# EAGLE board board_1117REGULATOR (EAGLE 9.1.1)
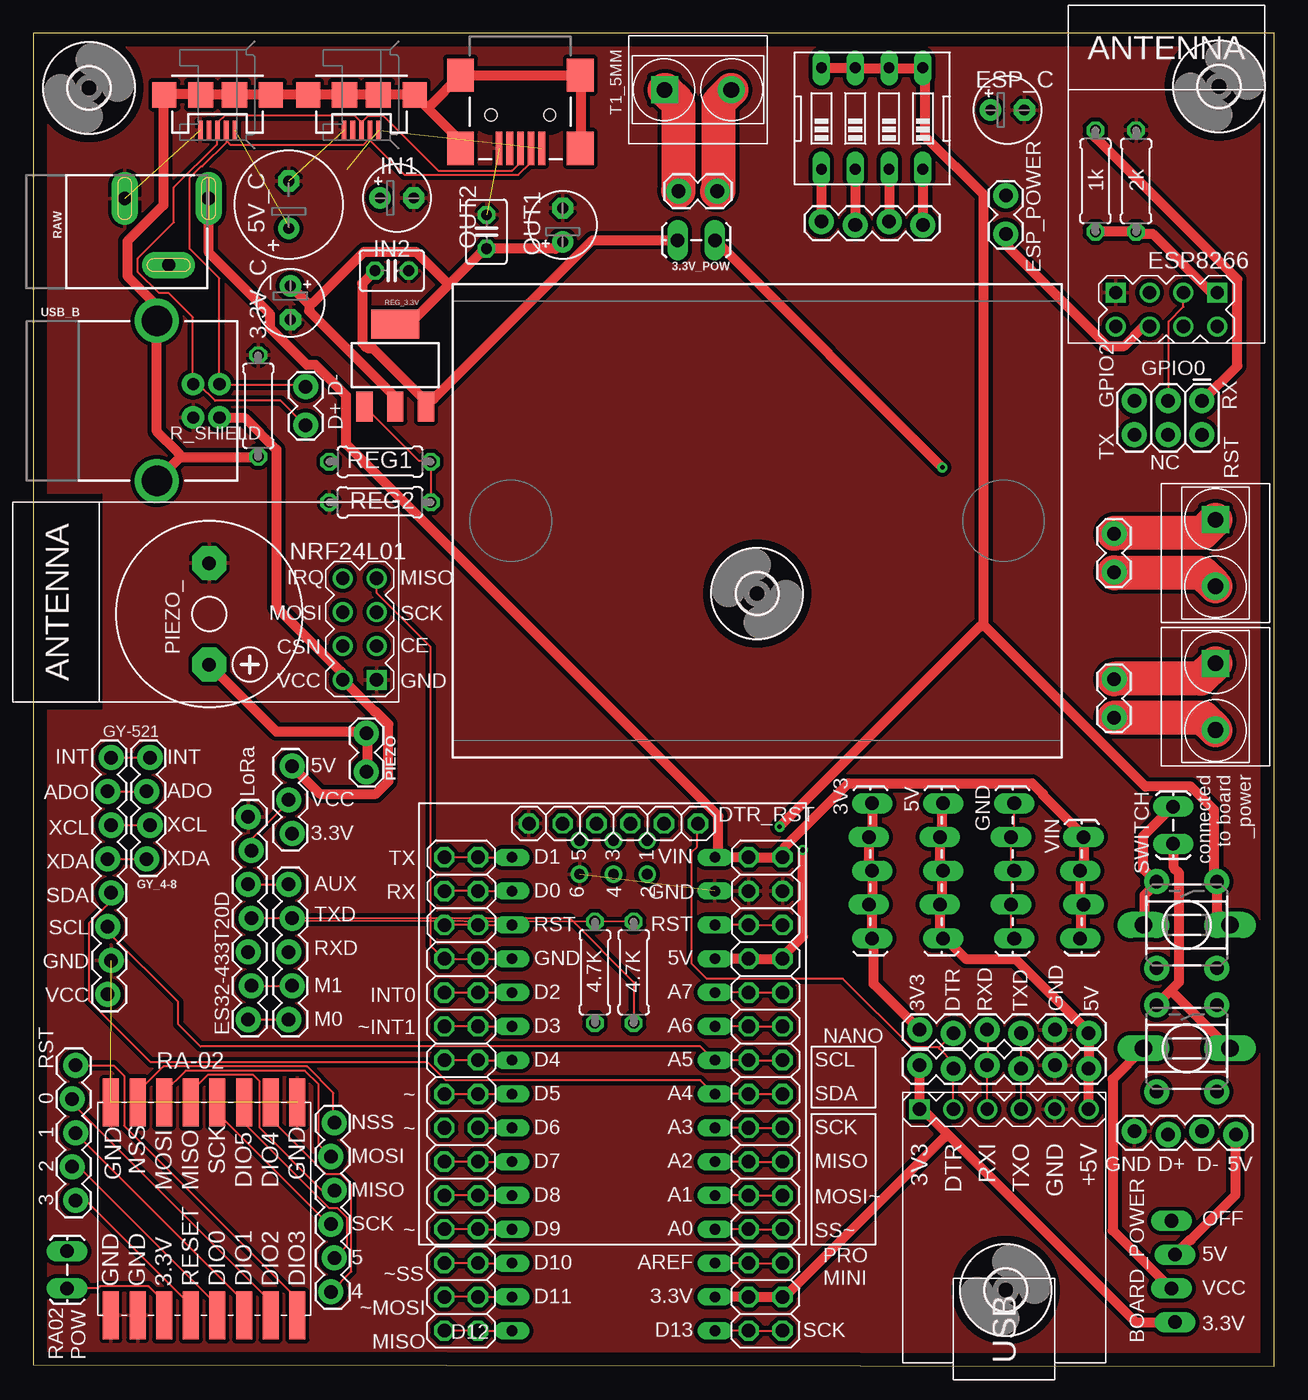
[diagram p0: board, top side]
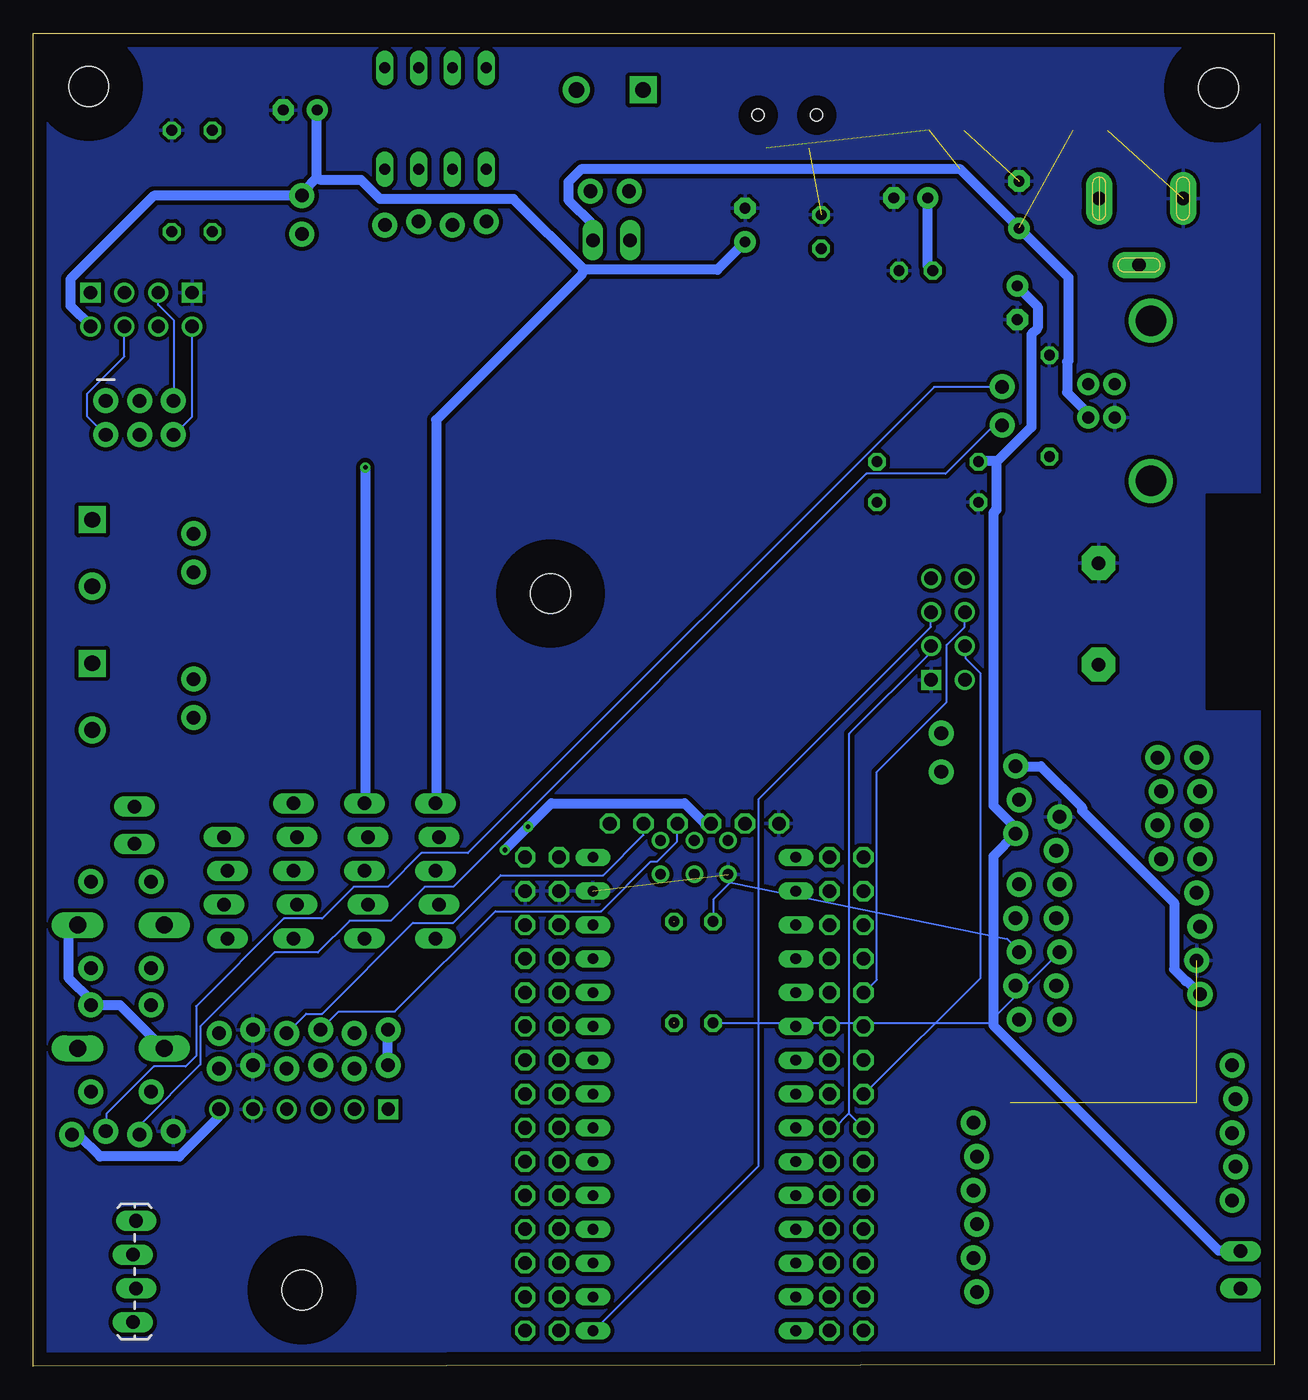
[diagram p1: board, bottom side, seen from below]

Size 93.2 x 100.13 mm. Coordinates in mm from the lower left corner, seen from the top.
Outline: 0,0.13 93.2,0 93.2,100.13 0,100.13 0,0.13
Copper layers (1*16): Top 0.035mm / dielectric 1.5mm / Bottom 0.035mm
Design rules "default": minimum track width 6mil, minimum drill 0.35mm, track to track 6mil, track to pad 6mil, pad to pad 6mil, via to via 6mil, smd to smd 6mil, copper to edge 40mil, drill to drill 6mil, minimum pad ring 10mil, minimum via ring 8mil, stop-mask expansion 4mil, vias tented up to drill 0mil, thermal gap 10mil
Net classes: 0 default: width 0.165 mm, drill 0.127 mm, clearance 0.152 mm; 1 power: width 0.762 mm, clearance 0.305 mm; 2 terminal: width 2.54 mm, clearance 0.305 mm
tRestrict: area 0.5,49.4 to 5.1,65.5
bRestrict: area 0.5,49.4 to 5.1,65.5

## Footprints (pad centres in the part's own frame; a part is rotated, then mirrored left to right if it is on the bottom)
1X03_LOCK = drill 1.016 pad 1.88: 1 0,0.127; 2 2.54,-0.127; 3 5.08,0.127
1X05_LOCK_LONGPADS = drill 1.016 long: 1 0,0; 2 2.54,-0.254; 3 5.08,0; 4 7.62,-0.254; 5 10.16,0
E2,5-5 = drill 0.813 pad 1.6: + -1.27,0 | drill 0.813 pad 1.6 octagon: - 1.27,0
1X02_LOCK_LONGPADS = drill 1.016 long: 1 -0.127,0; 2 2.667,0
E3,5-8 = drill 0.813 pad 1.6: + -1.778,0 | drill 0.813 pad 1.6 octagon: - 1.778,0
1X04_LOCK_LONGPADS = drill 1.016 long: 1 0,0; 2 2.54,-0.254; 3 5.08,0; 4 7.62,-0.254
USB-SERIAL-CP2102 = drill 1 square: 1 8.89,6.35 | drill 1: 2 8.89,3.81; 3 8.89,1.27; 4 8.89,-1.27; 5 8.89,-3.81; 6 8.89,-6.35
1X07_LOCK = drill 1.016 pad 1.88: 1 0,0.127; 2 2.54,-0.127; 3 5.08,0.127; 4 7.62,-0.127; 5 10.16,0.127; 6 12.7,-0.127; 7 15.24,0.127
0207/7 = drill 0.813 octagon: 1 -3.81,0; 2 3.81,0
WIRELESS-WIFI-ESP-01 = drill 1 square: A1 -8.89,3.81; D1 -8.89,-3.81 | drill 1: A2 -11.43,3.81; B1 -8.89,1.27; B2 -11.43,1.27; C1 -8.89,-1.27; C2 -11.43,-1.27; D2 -11.43,-3.81
2X3 = drill 1.016 pad 1.88: 1 0,0; 2 0,2.54; 3 2.54,0; 4 2.54,2.54; 5 5.08,0; 6 5.08,2.54
1X02_LOCK = drill 1.016 pad 1.88: 1 -0.178,0; 2 2.718,0
1X08_LOCK = drill 1.016 pad 1.88: 1 0,0.127; 2 2.54,-0.127; 3 5.08,0.127; 4 7.62,-0.127; 5 10.16,0.127; 6 12.7,-0.127; 7 15.24,0.127; 8 17.78,-0.127
1X04_LOCK = drill 1.016 pad 1.88: 1 0,0.127; 2 2.54,-0.127; 3 5.08,0.127; 4 7.62,-0.127
3,0 = hole 3: 0,0
C025-030X050 = drill 0.813 octagon: 1 -1.27,0; 2 1.27,0
1X05_LOCK = drill 1.016 pad 1.88: 1 0,0.127; 2 2.54,-0.127; 3 5.08,0.127; 4 7.62,-0.127; 5 10.16,0.127
1X06_LOCK = drill 1.016 pad 1.88: 1 0,0; 2 2.54,-0.254; 3 5.08,0; 4 7.62,-0.254; 5 10.16,0; 6 12.7,-0.254
USB-MICROB = smd 1.4 x 0.35: D+ -2.65,0; D- -2.65,-0.65; GND -2.65,1.3; ID -2.65,0.65; VBUS -2.65,-1.3 | smd 1.9 x 1.8: MT1 0,-4; MT2 0,4 | smd 1.9 x 1.9: P$1 0,-1.27; P$2 0,1.27
USB-MINIB = smd 2.5 x 0.5: D+ 2.5,0; D- 2.5,0.8; GND 2.5,-1.6; ID 2.5,-0.8; VBUS 2.5,1.6 | smd 2.5 x 2: S1 -3,4.5; S2 2.5,4.5; S3 -3,-4.5; S4 2.5,-4.5 | hole 0.9: 0,2.2; 0,-2.2
NANO = drill 0.8 long: 3.3V -10.16,24.13; 5V -10.16,-1.27; A0 -10.16,19.05; A1 -10.16,16.51; A2 -10.16,13.97; A3 -10.16,11.43; A4 -10.16,8.89; A5 -10.16,6.35; A6 -10.16,3.81; A7 -10.16,1.27; AREF -10.16,21.59; D2 5.08,1.27; D3 5.08,3.81; D4 5.08,6.35; D5 5.08,8.89; D6 5.08,11.43; D7 5.08,13.97; D8 5.08,16.51; D9 5.08,19.05; D10 5.08,21.59; D11 5.08,24.13; D12 5.08,26.67; D13 -10.16,26.67; GND -10.16,-6.35; GND1 5.08,-1.27; RAW -10.16,-8.89; RST -10.16,-3.81; RST1 5.08,-3.81; RX1 5.08,-6.35; TX0 5.08,-8.89 | drill 0.8: ICSP1 -5.08,-10.16; ICSP2 -5.08,-7.62; ICSP3 -2.54,-10.16; ICSP4 -2.54,-7.62; ICSP5 0,-10.16; ICSP6 0,-7.62
WIRELESS-NRF24L01 = drill 1 square: 1 -12.7,6.35 | drill 1: 2 -10.16,6.35; 3 -12.7,3.81; 4 -10.16,3.81; 5 -12.7,1.27; 6 -10.16,1.27; 7 -12.7,-1.27; 8 -10.16,-1.27
2X15 = drill 1.016 octagon: 1 -17.78,-1.27; 2 -17.78,1.27; 3 -15.24,-1.27; 4 -15.24,1.27; 5 -12.7,-1.27; 6 -12.7,1.27; 7 -10.16,-1.27; 8 -10.16,1.27; 9 -7.62,-1.27; 10 -7.62,1.27; 11 -5.08,-1.27; 12 -5.08,1.27; 13 -2.54,-1.27; 14 -2.54,1.27; 15 0,-1.27; 16 0,1.27; 17 2.54,-1.27; 18 2.54,1.27; 19 5.08,-1.27; 20 5.08,1.27; 21 7.62,-1.27; 22 7.62,1.27; 23 10.16,-1.27; 24 10.16,1.27; 25 12.7,-1.27; 26 12.7,1.27; 27 15.24,-1.27; 28 15.24,1.27; 29 17.78,-1.27; 30 17.78,1.27
F/CM12P = drill 1.016 pad 2.54 octagon: + 3.81,0; - -3.81,0
1X06/OCT = drill 1.016 octagon: 1 -6.35,0; 2 -3.81,0; 3 -1.27,0; 4 1.27,0; 5 3.81,0; 6 6.35,0
LORA-RA2-SMD = smd 3.6 x 1.2: 1 -8,7; 2 -8,5; 3 -8,3; 4 -8,1; 5 -8,-1; 6 -8,-3; 7 -8,-5; 8 -8,-7; 9 8,-7; 10 8,-5; 11 8,-3; 12 8,-1; 13 8,1; 14 8,3; 15 8,5; 16 8,7
POWER_JACK_SLOT = drill 1 pad 2 long: GND@1 2.58,7.5; GND@2 7.58,10.8; PWR 2.58,13.8
SOT223 = smd 1.219 x 2.235: 1 -2.311,-3.099; 2 0,-3.099; 3 2.311,-3.099 | smd 3.6 x 2.2: 4 0,3.099
TACTILE_SWITCH_PTH_6.0MM = drill 1.016 pad 1.88: 1 -3.251,2.261; 2 3.251,2.261; 3 -3.251,-2.261; 4 3.251,-2.261
DTS-3 = drill 1.3 long: 1 -3.25,0; 2 3.25,0
EDG-04 = drill 0.813 long: 1 -3.81,-3.81; 2 -1.27,-3.81; 3 1.27,-3.81; 4 3.81,-3.81; 5 3.81,3.81; 6 1.27,3.81; 7 -1.27,3.81; 8 -3.81,3.81
H2-5.0-10.5X8.0MM = drill 1.168 pad 2.032 square: 1 0,2.5 | drill 1.168 pad 2.032: 2 0,-2.5
USB-B-PTH = drill 0.914 pad 1.676: D+ 4,1.25; D- 5.981,1.25; GND 4,-1.25; VBUS 5.981,-1.25 | drill 2.286: SHLD1 1.282,-6.02; SHLD2 1.282,6.02

## Placement (x,y rotation side)
3.3/5  [1X03_LOCK]  19.3,45.09 270 top
3.3V  [1X05_LOCK_LONGPADS]  62.99,42.29 270 top
3.3V_C  [E2,5-5]  19.3,79.88 270 top
3.3V_POW  [1X02_LOCK_LONGPADS]  51.05,84.58 180 top
5V  [1X05_LOCK_LONGPADS]  68.33,42.29 270 top
5V_C  [E3,5-8]  19.18,87.25 90 top
B1  BREADBOARDMINI  [BREADBOARD-MINI]  54.36,63.5 180 top
BOARD_POWER  [1X04_LOCK_LONGPADS]  85.47,10.92 270 bottom
CP2102_USB-SERIAL  [USB-SERIAL-CP2102]  72.9,10.41 90 top
ES32-433T20D  [1X07_LOCK]  16.26,26.04 90 top
ESP1  1k  [0207/7]  79.76,89.03 90 top
ESP2  2k  [0207/7]  82.8,89.03 270 top
ESP8266  [WIRELESS-WIFI-ESP-01]  85.09,89.53 90 top
ESP_C  [E2,5-5]  73.15,94.36 0 top
ESP_H  [2X3]  87.76,72.52 180 top
ESP_POW  [1X02_LOCK]  73.03,87.76 270 top
GND  [1X05_LOCK_LONGPADS]  73.66,42.29 270 top
GY-521  [1X08_LOCK]  5.71,27.94 90 top
GY_4-8  [1X04_LOCK]  8.64,45.72 270 top
H1  MOUNT-HOLE3.0  [3,0]  4.19,96.01 0 top
H2  MOUNT-HOLE3.0  [3,0]  89.03,96.14 0 top
H3  MOUNT-HOLE3.0  [3,0]  73.03,5.71 0 top
H4  MOUNT-HOLE3.0  [3,0]  54.36,58.04 270 top
IN1  [E2,5-5]  27.3,87.76 0 top
IN2  [C025-030X050]  26.92,82.3 0 top
J1  [1X05_LOCK]  19.3,26.04 90 top
J2  [1X02_LOCK_LONGPADS]  85.6,41.91 270 top
J3  [1X02_LOCK_LONGPADS]  2.54,8.51 270 top
J4  [1X04_LOCK]  66.8,85.85 180 top
J5  [1X06_LOCK]  22.61,18.29 270 top
J6  [1X05_LOCK]  3.05,22.61 270 top
J7  [1X06_LOCK]  66.55,22.61 0 top
J8  [1X04_LOCK]  90.3,17.53 180 top
J9  [1X06_LOCK]  66.55,25.27 0 top
MICRO_1  [USB-MICROB]  24.64,95.5 90 top
MICRO_2  [USB-MICROB]  13.84,95.5 90 top
MINI_1  USB_MINI-B_SMT  [USB-MINIB]  36.58,93.98 270 top
NANO  NANO  [NANO]  41.02,29.34 180 top
NRF24L01  [WIRELESS-NRF24L01]  13.08,57.91 180 top
OUT1  [E2,5-5]  39.75,85.72 90 top
OUT2  [C025-030X050]  34.04,85.22 90 top
PH1  [2X15]  54.99,20.45 90 top
PH2  [2X15]  32.13,20.45 90 top
PIEZO  [1X02_LOCK]  25.02,44.83 90 top
PIEZO_  [F/CM12P]  13.21,56.52 270 top
PIN1  [1X02_LOCK]  51.18,88.27 180 top
PIN2  [1X02_LOCK]  81.15,59.82 90 top
PIN3  [1X02_LOCK]  81.15,48.9 90 top
PROMINI_H  [1X06/OCT]  43.56,40.77 0 top
R1  4.7k  [0207/7]  45.09,29.59 270 top
R2  4.7K  [0207/7]  42.16,29.59 270 top
R_SHIELD  10k  [0207/7]  16.89,72.14 90 top
RA-02  [LORA-RA2-SMD]  12.83,11.81 90 top
RAW  [POWER_JACK_SLOT]  -0.64,90.3 270 top
REG1  [0207/7]  26.04,67.94 180 top
REG2  [0207/7]  26.04,64.9 0 top
REG_3.3V  [SOT223]  27.18,75.18 0 top
S1  MOMENTARY-SWITCH-SPST-PTH-6.0MM  [TACTILE_SWITCH_PTH_6.0MM]  86.61,33.15 270 top
S2  MOMENTARY-SWITCH-SPST-PTH-6.0MM  [TACTILE_SWITCH_PTH_6.0MM]  86.61,23.88 270 top
S3  DTS-3  [DTS-3]  86.61,33.15 180 top
S4  DTS-3  [DTS-3]  86.61,23.88 180 top
SW1  [EDG-04]  62.99,93.73 0 top
T1_5MM  5mm  [H2-5.0-10.5X8.0MM]  49.91,95.88 90 top
T2_5MM  5mm  [H2-5.0-10.5X8.0MM]  88.77,61.09 0 top
T3_5MM  5mm  [H2-5.0-10.5X8.0MM]  88.77,50.29 0 top
USB_B  [USB-B-PTH]  8,72.52 0 top
USB_DATA  [1X02_LOCK]  20.45,73.41 270 top
VIN  [1X04_LOCK_LONGPADS]  78.61,32.13 90 top

## Library data of the parts
3.3/5 3.3V 3.3V_POW 5V ES32-433T20D ESP_POW GND GY-521 J1-J3 J5-J7 J9 PIEZO PIN1-PIN3 USB_DATA = SparkFun-Connectors
3.3V_C ESP_C IN1 IN2 OUT1 OUT2 = rcl; SPICEPREFIX: C
5V_C = resistor
B1 = SparkFun-Boards; PROD_ID: COMP-12034
BOARD_POWER GY_4-8 J4 J8 VIN = SparkFun-Connectors; PROD_ID: CONN-09696
CP2102_USB-SERIAL ESP8266 NRF24L01 = diy-modules
ESP1 ESP2 R1 R2 R_SHIELD REG1 REG2 = rcl; SPICEPREFIX: R
ESP_H = SparkFun-Connectors; PROD_ID: CONN-11566; VALUE: FEMALE 2x3
H1-H4 = holes
MICRO_1 MICRO_2 = SparkFun-Connectors; PROD_ID: CONN-09505; SF_ID: PRT-08533
MINI_1 = SparkFun-Connectors; PROD_ID: CONN-08193; SF_ID: PRT-00587
NANO = Arduino-clone
PH1 PH2 = pinhead
PIEZO_ = buzzer; OC_FARNELL: unknown; OC_NEWARK: unknown
PROMINI_H = pinhead_v2
RA-02 = LikeCircuit
RAW = SparkFun-Connectors; PROD_ID: PRT-00119
REG_3.3V = SparkFun-IC-Power; PROD_ID: VREG-08170
S1 S2 = SparkFun-Switches; PROD_ID: SWCH-08441; SF_SKU: COM-00097
S3 S4 = switch-tact
SW1 = special
T1_5MM T2_5MM T3_5MM = Seeed-Connector
USB_B = SparkFun-Connectors; PROD_ID: CONN-08278; SF_ID: PRT-00139

## Nets
3.3V [power]: 3.3/5.3 3.3V.1 3.3V.2 3.3V.3 3.3V.4 3.3V.5 3.3V_C.+ BOARD_POWER.4 CP2102_USB-SERIAL.1 ESP8266.D2 ESP_C.+ ESP_POW.1 J3.1 J7.1 J9.1 NANO.3.3V OUT1.+ OUT2.1 PH1.3 PH1.4 REG1.2 REG_3.3V.2 REG_3.3V.4
5V [power]: 3.3/5.1 3.3V_POW.1 5V.1 5V.2 5V.3 5V.4 5V.5 5V_C.+ BOARD_POWER.2 CP2102_USB-SERIAL.6 GY-521.1 J7.6 J8.1 J9.6 MICRO_1.VBUS MICRO_2.VBUS MINI_1.VBUS NRF24L01.2 USB_B.VBUS
A5: GY-521.3 NANO.A5 PH1.17 PH1.18
A6: NANO.A6 PH1.19 PH1.20
A7: NANO.A7 PH1.21 PH1.22
CE_NRF: NANO.D6 NRF24L01.3 PH2.13 PH2.14
CSN_NRF: NANO.D5 NRF24L01.4 PH2.15 PH2.16
D+_5PIN: J8.3 MICRO_1.D+ MICRO_2.D+ MINI_1.D+ USB_B.D+ USB_DATA.2
D-_5PIN: J8.2 MICRO_1.D- MICRO_2.D- MINI_1.D- USB_B.D- USB_DATA.1
GND [power]: 3.3V_C.- 5V_C.- CP2102_USB-SERIAL.5 ES32-433T20D.7 ESP2.1 ESP8266.A1 ESP_C.- GY-521.2 IN1.- IN2.2 J7.5 J8.4 J9.5 MICRO_1.GND MICRO_2.GND MINI_1.GND NANO.GND NANO.ICSP6 NRF24L01.1 OUT1.- OUT2.2 PH1.27 PH1.28 PIEZO_.- PROMINI_H.1 R_SHIELD.2 RA-02.1 RA-02.2 RA-02.9 RA-02.16 RAW.GND@1 REG2.1 USB_B.GND
MISO_NRF: NANO.GND1 NRF24L01.7 PH2.23 PH2.24
MOSI_NRF: NANO.D2 NRF24L01.6 PH2.21 PH2.22
N$1: ES32-433T20D.2 J1.2
N$2: GY-521.5 GY_4-8.4
N$3: NANO.AREF PH1.5 PH1.6
N$4: NANO.A0 PH1.7 PH1.8
N$5: NANO.A1 PH1.9 PH1.10
N$6: NANO.A2 PH1.11 PH1.12
N$7: NANO.A3 PH1.13 PH1.14
N$8: GY-521.6 GY_4-8.3
N$9: GY-521.7 GY_4-8.2
N$10: GY-521.8 GY_4-8.1
N$11: 3.3/5.2 ES32-433T20D.6
N$12: ES32-433T20D.1 J1.1
N$13: J1.4 R1.1
N$14: J1.3 R2.1
N$15: ES32-433T20D.4 R1.2
N$16: NANO.D12 PH2.1 PH2.2
N$17: NANO.D11 PH2.3 PH2.4
N$18: NANO.D10 PH2.5 PH2.6
N$19: NANO.D9 PH2.7 PH2.8
N$20: NANO.D8 PH2.9 PH2.10
N$21: NANO.D7 PH2.11 PH2.12
N$22: ES32-433T20D.5 J1.5
N$23 [terminal]: PIN1.2 T1_5MM.1
N$24: NANO.D4 PH2.17 PH2.18
N$25: NANO.D3 PH2.19 PH2.20
N$26 [terminal]: PIN1.1 T1_5MM.2
N$27 [terminal]: PIN2.2 T2_5MM.1
N$28: NANO.RST1 PH2.25 PH2.26
N$29: NANO.RX1 PH2.27 PH2.28
N$30: NANO.TX0 PH2.29 PH2.30
N$31 [terminal]: PIN2.1 T2_5MM.2
N$32 [terminal]: PIN3.2 T3_5MM.1
N$33 [terminal]: PIN3.1 T3_5MM.2
N$34 [power]: PIEZO.1 PIEZO.2 PIEZO_.+
N$35: GND.1 GND.2 GND.3 GND.4 GND.5
N$36 [power]: BOARD_POWER.3 NANO.5V PH1.23 PH1.24 PROMINI_H.3 S1.1 S2.1 S3.1 S4.2 SW1.5 SW1.6 SW1.7 SW1.8
N$37 [power]: J2.1 S1.3 S3.2
N$38: ES32-433T20D.3 R2.2
N$39 [power]: J4.1 SW1.4
N$40 [power]: J4.2 SW1.3
N$41 [power]: J4.3 SW1.2
N$42 [power]: J4.4 SW1.1
N$43 [power]: J2.2 S2.3 S4.1
N$44: J6.1 RA-02.8
N$45: J6.2 RA-02.7
N$46: J6.3 RA-02.6
N$47: J6.4 RA-02.5
N$48: J6.5 RA-02.4
N$49: J5.1 RA-02.15
N$50: J5.2 RA-02.14
N$51: J5.3 RA-02.13
N$52: J5.4 RA-02.12
N$53: J5.5 RA-02.11
N$54: J5.6 RA-02.10
N$55 [power]: ESP8266.B2 ESP_POW.2
N$56: CP2102_USB-SERIAL.2 J7.2 J9.2 PROMINI_H.6
N$57: CP2102_USB-SERIAL.3 J7.3 J9.3 PROMINI_H.4
N$58 [power]: ESP1.1 ESP2.2 ESP8266.D1
N$59: ESP8266.C2 ESP_H.2
N$60: ESP8266.C1 ESP_H.3
N$61 [power]: ESP1.2 ESP_H.1
N$62: CP2102_USB-SERIAL.4 J7.4 J9.4 PROMINI_H.5
N$63: ESP8266.B1 ESP_H.5
N$64: ESP8266.A2 ESP_H.6
N$76: J3.2 RA-02.3
N$77 [power]: 3.3V_POW.2 IN1.+ IN2.1 REG_3.3V.3
N$79: REG1.1 REG2.2 REG_3.3V.1
RST: NANO.RST PH1.25 PH1.26
SCK_NRF: NANO.D13 NRF24L01.5 PH1.1 PH1.2
SDA_GY521: GY-521.4 NANO.A4 PH1.15 PH1.16
SHIELD_IN [power]: MICRO_1.MT1 MICRO_1.MT2 MICRO_1.P$1 MICRO_1.P$2 MICRO_2.MT1 MICRO_2.MT2 MICRO_2.P$1 MICRO_2.P$2 MINI_1.S1 MINI_1.S2 MINI_1.S3 MINI_1.S4 R_SHIELD.1 USB_B.SHLD1 USB_B.SHLD2
VIN [power]: NANO.RAW PH1.29 PH1.30 RAW.PWR VIN.1 VIN.2 VIN.3 VIN.4

## Tracks (layer width: path | path; a pad name or v marks a point on that pad's centre or on a via)
3.3V
  Top 0.762: 3.3V.1 63.02,42.28 63.02,40.05 3.3V.2 62.79,39.73 62.79,37.51 3.3V.3 63.02,37.2 63.02,34.97 3.3V.4 62.79,34.66 62.94,34.5 62.94,32.2 3.3V.5 63.1,31.8 63.1,28.7 66.52,25.29 J9.1 | NANO.3.3V 51.2,5.21 53.66,5.21 PH1.4 54.05,5.21 56.2,5.21 PH1.3 56.59,5.37 68.42,17.19 68.66,17.43 | J7.1 66.52,22.59 66.52,19.34 CP2102_USB-SERIAL.1 66.91,19.18 68.66,17.43 | BOARD_POWER.4 82.79,3.3 68.66,17.43 | OUT1.+ 39.69,84.42 39.21,83.95 34.05,83.95 OUT2.1 33.73,83.79 31.19,81.25 | 31.19,81.25 28.26,78.31 27.23,78.31 REG_3.3V.4 | 20.72,79.74 20.72,79.26 27.15,72.83 27.15,72.12 REG_3.3V.2 | 20.72,79.74 19.37,81.09 3.3V_C.+ | 31.19,81.25 30.96,81.49 28.73,83.71 24.84,83.71 21.03,79.9 20.72,79.74
  Bottom 0.762: J9.1 66.6,25.21 66.6,22.67 J7.1 | J3.1 2.54,8.7 4.21,8.7 21.11,25.61 21.11,38.31 19.45,39.97 3.3/5.3 19.53,40.37 19.53,40.53 21.11,42.12 21.11,64.1 20.88,64.34 20.88,67.67 20.88,67.99 | ESP8266.D2 88.9,78.15 90.41,79.66 90.41,81.64 84.14,87.92 73.03,87.92 ESP_POW.1 72.87,88.31 71.91,89.27 | 71.91,89.27 71.91,94.34 ESP_C.+ | 20.88,67.99 20.8,67.99 18.26,70.53 18.26,77.52 17.78,77.99 17.78,79.58 19.29,81.09 3.3V_C.+ | 20.88,67.99 22.23,67.99 REG1.2 | 51.83,82.36 57.15,87.68 67.15,87.68 68.58,89.11 71.6,89.11 71.91,89.27 | 51.83,82.36 41.83,82.36 39.77,84.42 OUT1.+ | 3.3V.1 62.94,42.35 62.94,71.09 51.99,82.04 51.83,82.36
5V  (via drill 0.35)  (3 unrouted)
  Top 0.762: BOARD_POWER.2 86.84,9.49 86.92,9.49 90.25,12.83 90.25,17.35 J8.1 | CP2102_USB-SERIAL.6 79.22,19.34 79.22,22.35 J7.6 79.3,22.67 79.3,24.97 J9.6 79.06,25.29 73.74,30.61 70.01,30.61 68.66,31.96 5V.5 68.26,32.2 68.1,32.35 68.1,34.66 5V.4 68.26,34.97 68.26,37.2 5V.3 68.1,37.51 68.1,39.73 5V.2 68.26,40.05 68.26,42.28 5V.1 | 3.3/5.1 19.45,45.05 21.51,42.99 25.72,42.99 26.67,43.94 26.67,48.23 25.72,49.18 25.64,49.18 23.26,51.56 NRF24L01.2 23.1,51.88 23.1,52.2 18.26,57.04 18.26,68.87 15.88,71.25 14.05,71.25 USB_B.VBUS | v68.26,67.52 51.2,84.58 3.3V_POW.1
  Bottom 0.762: J8.1 90.25,17.35 89.77,17.35 88.19,15.76 82.23,15.76 79.3,18.7 79.3,19.26 CP2102_USB-SERIAL.6 | GY-521.1 5.64,27.99 6.59,28.94 6.67,28.94 7.54,29.81 7.54,34.81 14.45,41.72 14.45,41.96 17.54,45.05 19.37,45.05 3.3/5.1 | 3.3V_POW.1 51.2,84.58 51.2,85.77 53.02,87.6 53.02,88.95 52.07,89.9 23.57,89.9 19.21,85.53 5V_C.+ 18.89,85.22 15.48,81.8 15.48,75.53 15.56,75.45 15.56,73.15 14.05,71.64 14.05,71.33 USB_B.VBUS | v68.26,67.52 68.26,42.35 5V.1
A5
  Top 0.165: PH1.17 56.2,22.99 53.74,22.99 PH1.18 53.66,22.99 51.2,22.99 NANO.A5 51.12,22.99 50.09,24.02 12.54,24.02 10.87,25.69 10.87,27.35 5.64,32.59 5.64,32.99 GY-521.3
A6
  Top 0.165: NANO.A6 51.2,25.53 53.66,25.53 PH1.20 53.74,25.53 56.2,25.53 PH1.19
A7
  Top 0.165: NANO.A7 51.2,28.07 53.66,28.07 PH1.22 53.74,28.07 56.2,28.07 PH1.21
CE_NRF
  Top 0.165: NANO.D6 35.88,17.91 33.42,17.91 PH2.13
  Bottom 0.165: 31.91,18.94 31.91,47.51 25.8,53.63 25.8,54.1 NRF24L01.3 | 31.91,18.94 30.88,17.91 PH2.14 | PH2.13 33.34,17.91 33.02,17.91 31.99,18.94 31.91,18.94
CSN_NRF
  Top 0.165: NANO.D5 35.88,20.45 33.42,20.45 PH2.15 33.34,20.45 30.88,20.45 PH2.16
  Bottom 0.165: NRF24L01.4 23.18,54.1 23.18,53.15 22.07,52.04 22.07,29.18 30.8,20.45 PH2.16
D+_5PIN
  Top 0.165: MINI_1.D+ 36.51,91.41 36.51,90.38 35.96,89.82 30.4,89.82 26.27,93.95 25.16,93.95 24.69,93.47 MICRO_1.D+ 24.61,92.92 24.61,93.47 24.13,93.95 14.37,93.95 13.89,93.47 13.89,92.92 MICRO_2.D+ 13.81,92.84 13.81,91.8 10.56,88.55 10.56,85.93 7.86,83.23 7.86,82.2 9.45,80.61 10.16,80.61 11.99,78.79 11.99,73.79 USB_B.D+ 12.06,73.71 12.46,73.71 13.65,72.52 18.57,72.52 20.4,70.69 USB_DATA.2
  Bottom 0.165: J8.3 85.17,17.43 85.17,18.14 80.64,22.67 80.64,25.53 75.09,31.08 71.83,31.08 69.45,33.46 66.36,33.46 63.82,36 61.67,36 30.64,67.04 24.69,67.04 21.11,70.61 20.48,70.61 USB_DATA.2
D-_5PIN
  Top 0.165: 14.53,92.04 14.53,92.84 MICRO_2.D- | 14.53,92.04 14.84,91.73 24.77,91.73 25.2,92.16 | 25.2,92.16 25.24,92.2 25.24,92.84 MICRO_1.D- | MINI_1.D- 37.31,91.41 37.31,90.38 36.43,89.5 27.86,89.5 25.24,92.12 25.2,92.16 | USB_DATA.1 20.4,73.63 20.32,73.71 14.05,73.71 USB_B.D- 13.97,73.79 13.97,81.72 11.75,83.95 11.75,89.27 12.62,90.14 12.7,90.14 14.53,91.96 14.53,92.04
  Bottom 0.165: J8.2 87.71,17.67 87.71,18.94 84.14,22.51 81.76,22.51 80.96,23.3 80.96,27.04 74.37,33.62 71.52,33.62 69.14,36 66.6,36 64.06,38.54 60.56,38.54 25.56,73.55 20.48,73.55 USB_DATA.1
GND  (6 unrouted)
  pour Top: 0.13,100.08 0.13,0.13 93.22,0.13 93.22,100.08
  pour Bottom: 0,99.95 0,0 93.22,0 93.22,99.95 0,100.08
MISO_NRF
  Top 0.165: NANO.GND1 35.88,30.61 33.42,30.61 PH2.23 33.34,30.61 30.88,30.61 PH2.24 30.8,30.61 29.84,31.56 29.84,54.02 25.8,58.07 25.8,59.18 NRF24L01.7
MOSI_NRF
  Top 0.165: NANO.D2 35.88,28.07 33.42,28.07 PH2.21 33.34,28.07 30.88,28.07 PH2.22
  Bottom 0.165: NRF24L01.6 23.26,56.64 23.26,55.53 24.61,54.18 24.61,49.9 29.84,44.66 29.84,29.02 30.8,28.07 PH2.22
N$1
  Top 0.165: ES32-433T20D.2 16.43,28.54 19.37,28.54 J1.2
N$2
  Top 0.165: GY-521.5 5.64,38.07 8.49,38.07 GY_4-8.4
N$3
  Top 0.165: NANO.AREF 51.2,7.75 53.66,7.75 PH1.6 53.74,7.75 56.2,7.75 PH1.5
N$4
  Top 0.165: NANO.A0 51.2,10.29 53.66,10.29 PH1.8 53.74,10.29 56.2,10.29 PH1.7
N$5
  Top 0.165: NANO.A1 51.2,12.83 53.66,12.83 PH1.10 53.74,12.83 56.2,12.83 PH1.9
N$6
  Top 0.165: NANO.A2 51.2,15.37 53.66,15.37 PH1.12 53.74,15.37 56.2,15.37 PH1.11
N$7
  Top 0.165: NANO.A3 51.2,17.91 53.66,17.91 PH1.14 53.74,17.91 56.2,17.91 PH1.13
N$8
  Top 0.165: GY-521.6 5.87,40.61 8.73,40.61 GY_4-8.3
N$9
  Top 0.165: GY-521.7 5.64,43.15 8.49,43.15 GY_4-8.2
N$10
  Top 0.165: GY-521.8 5.87,45.69 8.73,45.69 GY_4-8.1
N$11
  Top 0.165: ES32-433T20D.6 16.43,38.78 16.43,39.66 19.13,42.35 19.13,42.51 3.3/5.2
N$12
  Top 0.165: ES32-433T20D.1 16.19,26 19.13,26 J1.1
N$13  (1 unrouted)
  Top 0.165: R1.1 45.04,33.39 19.64,33.45 J1.4
N$14
  Bottom 0.165: R2.1 42.13,33.4 42.13,35.07 40.86,36.34 20.07,32.1 19.13,31.16 J1.3
N$15  (1 unrouted)
  Top 0.165: R1.2 45.1,25.83 45.1,28.84 40.32,33.62 16.35,33.62 ES32-433T20D.4
N$16
  Top 0.165: NANO.D12 35.88,2.67 33.42,2.67 PH2.1 33.34,2.67 30.88,2.67 PH2.2
N$17
  Top 0.165: NANO.D11 35.88,5.21 33.42,5.21 PH2.3 33.34,5.21 30.88,5.21 PH2.4
N$18
  Top 0.165: NANO.D10 35.88,7.75 33.42,7.75 PH2.5 33.34,7.75 30.88,7.75 PH2.6
N$19
  Top 0.165: NANO.D9 35.88,10.29 33.42,10.29 PH2.7 33.34,10.29 30.88,10.29 PH2.8
N$20
  Top 0.165: NANO.D8 35.88,12.83 33.42,12.83 PH2.9 33.34,12.83 30.88,12.83 PH2.10
N$21
  Top 0.165: NANO.D7 35.88,15.37 33.42,15.37 PH2.11 33.34,15.37 30.88,15.37 PH2.12
N$22
  Top 0.165: ES32-433T20D.5 16.19,36.16 19.13,36.16 J1.5
N$23
  Top 2.54: PIN1.2 48.42,88.31 48.42,94.9 47.47,95.85 T1_5MM.1
N$24
  Top 0.165: NANO.D4 35.88,22.99 33.42,22.99 PH2.17 33.34,22.99 30.88,22.99 PH2.18
N$25
  Top 0.165: NANO.D3 35.88,25.53 33.42,25.53 PH2.19 33.34,25.53 30.88,25.53 PH2.20
N$26
  Top 2.54: PIN1.1 51.44,88.31 51.44,94.9 52.39,95.85 T1_5MM.2
N$27
  Top 2.54: PIN2.2 81.2,62.6 87.79,62.6 88.74,63.55 T2_5MM.1
N$28
  Top 0.165: NANO.RST1 35.88,33.15 33.42,33.15 PH2.25 33.34,33.15 30.88,33.15 PH2.26
N$29
  Top 0.165: NANO.RX1 35.88,35.69 33.42,35.69 PH2.27 33.34,35.69 30.88,35.69 PH2.28
N$30
  Top 0.165: NANO.TX0 35.88,38.23 33.42,38.23 PH2.29 33.34,38.23 30.88,38.23 PH2.30
N$31
  Top 2.54: PIN2.1 81.2,59.58 87.79,59.58 88.74,58.63 T2_5MM.2
N$32
  Top 2.54: PIN3.2 81.2,51.64 87.63,51.64 88.74,52.75 T3_5MM.1
N$33
  Top 2.54: PIN3.1 81.2,48.71 87.87,48.71 88.74,47.83 T3_5MM.2
N$34
  Top 0.762: PIEZO.1 25.08,44.66 25.08,47.51 PIEZO.2 24.69,47.67 18.26,47.67 13.26,52.67 PIEZO_.+
N$35
  Top 0.165: GND.5 73.66,32.2 73.42,32.43 73.42,34.66 GND.4 73.42,34.73 73.42,37.04 73.58,37.2 GND.3 73.66,37.28 73.42,37.51 73.42,39.73 GND.2 73.42,39.82 73.66,40.05 73.66,42.28 GND.1
N$36  (via drill 0.35)
  Top 0.762: BOARD_POWER.3 85.41,5.84 81.04,10.21 81.04,21.56 83.34,23.86 S4.2 | NANO.5V 51.2,30.61 53.66,30.61 PH1.24 54.05,30.61 56.2,30.61 PH1.23 56.44,30.92 57.78,32.27 v57.78,38.78 | SW1.8 59.21,97.52 61.67,97.52 SW1.7 62.07,97.52 64.21,97.52 SW1.6 64.61,97.52 66.75,97.52 SW1.5 66.99,97.2 66.99,92.36 71.36,87.99 71.36,55.69 | S3.1 88.9,34.1 88.9,36.32 S1.1 88.66,36.72 88.66,41.8 86.92,43.55 83.5,43.55 71.36,55.69 | v56.04,40.53 71.04,55.53 71.36,55.69
  Bottom 0.762: S4.2 83.42,23.86 86.68,27.11 88.82,27.11 S2.1 88.9,27.51 90.57,29.18 90.57,32.51 89.93,33.15 S3.1 | v57.78,38.78 v56.04,40.53 54.29,42.28 44.29,42.28 42.78,40.77 42.31,40.77 PROMINI_H.3
N$37
  Top 0.762: J2.1 85.57,42.04 83.34,39.82 83.34,37.35 84.3,36.4 S1.3 84.14,36.08 83.42,35.37 83.42,33.15 S3.2
N$38
  Bottom 0.165: R2.2 21.46,25.78 ES32-433T20D.3
N$39
  Top 0.762: SW1.4 66.83,89.9 66.83,85.77 J4.1
N$40
  Top 0.762: SW1.3 64.29,89.9 64.29,86.01 J4.2
N$41
  Top 0.762: SW1.2 61.75,89.9 61.75,85.77 J4.3
N$42
  Top 0.762: SW1.1 59.21,89.9 59.21,86.01 J4.4
N$43
  Top 0.762: 85.41,28.23 84.38,27.19 S2.3 | 85.41,28.23 86.04,28.86 86.04,37.04 85.65,37.43 85.65,39.18 J2.2 | S4.1 89.85,23.94 89.69,23.94 85.65,27.99 85.41,28.23
N$44
  Top 0.165: RA-02.8 19.76,3.86 19.76,5.13 6.83,18.07 6.83,21.8 6.03,22.59 3.17,22.59 J6.1
N$45
  Top 0.165: RA-02.7 17.78,3.86 17.78,4.89 2.94,19.73 2.94,20.05 J6.2
N$46
  Top 0.165: RA-02.6 15.8,3.86 15.8,4.89 3.17,17.51 J6.3
N$47
  Top 0.165: RA-02.5 13.81,3.86 13.81,4.57 3.41,14.97 2.94,14.97 J6.4
N$48
  Top 0.165: RA-02.4 11.83,3.86 11.83,4.57 3.97,12.43 3.17,12.43 J6.5
N$49
  Top 0.165: RA-02.15 7.86,19.81 7.86,20.61 9.76,22.51 20.56,22.51 22.54,20.53 22.54,18.3 J5.1
N$50
  Top 0.165: RA-02.14 9.84,19.81 9.84,20.61 11.43,22.19 20.4,22.19 21.43,21.16 21.43,16.64 22.3,15.76 J5.2
N$51
  Top 0.165: RA-02.13 11.91,19.81 11.91,20.68 13.1,21.88 16.51,21.88 16.99,21.4 16.99,17.91 21.67,13.22 22.54,13.22 J5.3
N$52
  Top 0.165: RA-02.12 13.89,19.73 13.89,18.94 22.15,10.68 22.3,10.68 J5.4
N$53
  Top 0.165: RA-02.11 15.88,19.73 15.88,18.22 22.23,11.88 22.86,11.88 23.57,11.16 23.57,9.1 22.62,8.14 J5.5
N$54
  Top 0.165: RA-02.10 17.86,19.73 17.86,18.54 21.99,14.41 23.1,14.41 23.89,13.62 23.89,7.11 22.38,5.6 J5.6
N$55
  Top 0.762: ESP8266.B2 83.82,78.07 83.34,78.07 81.92,76.64 80.64,76.64 73.03,84.27 73.03,84.98 ESP_POW.2
N$56
  Top 0.165: CP2102_USB-SERIAL.2 69.06,19.34 69.06,22.35 J7.2 69.06,22.43 69.06,22.83 68.02,23.86 68.02,23.94 | 68.02,23.94 65.96,23.94 60.8,29.1 50.56,29.1 49.45,30.21 49.45,38.62 49.85,39.02 49.85,40.77 PROMINI_H.6 | 68.02,23.94 69.06,24.97 J9.2
N$57
  Top 0.165: CP2102_USB-SERIAL.3 71.6,19.34 71.6,22.59 J7.3 71.68,22.67 71.68,25.21 J9.3
  Bottom 0.165: PROMINI_H.4 44.85,40.77 44.85,39.42 46.35,37.91 46.83,37.91 50.56,34.18 58.5,34.18 66.04,26.64 70.25,26.64 71.6,25.29 J9.3
N$58
  Top 0.762: ESP1.1 79.77,85.22 82.79,85.22 ESP2.2 83.11,85.06 84.06,85.06 88.42,80.69 88.9,80.69 ESP8266.D1
N$59
  Bottom 0.165: ESP8266.C2 86.36,78.07 86.36,75.85 89.14,73.07 89.14,71.33 87.79,69.98 ESP_H.2
N$60
  Top 0.165: ESP8266.C1 86.36,80.61 86.36,79.58 85.25,78.47 85.25,72.52 ESP_H.3
N$61
  Top 0.762: ESP1.2 79.77,92.84 79.77,92.28 90.41,81.64 90.41,75.14 87.79,72.52 ESP_H.1
N$62
  Top 0.165: CP2102_USB-SERIAL.4 74.14,19.34 74.14,22.35 J7.4 74.14,22.43 74.14,24.97 J9.4
  Bottom 0.165: PROMINI_H.5 47.39,40.77 47.39,39.89 50.4,36.88 58.1,36.88 61.67,33.31 64.69,33.31 71.52,26.48 72.71,26.48 74.14,25.05 J9.4
N$63
  Bottom 0.165: ESP8266.B1 83.82,80.61 83.82,79.74 82.63,78.55 82.63,72.52 ESP_H.5
N$64
  Bottom 0.165: ESP8266.A2 81.28,78.07 81.28,71.33 82.63,69.98 ESP_H.6
N$76
  Top 0.165: J3.2 4.84,5.84 5,6 8.65,6 9.76,4.89 9.76,3.86 RA-02.3
N$77
  Top 0.762: IN2.1 25.64,82.28 24.69,81.33 24.69,76.88 25.08,76.49 25.48,76.49 29.45,72.52 29.45,72.12 REG_3.3V.3 29.77,72.68 30.08,72.68 41.99,84.58 48.34,84.58 3.3V_POW.2
  Bottom 0.762: IN1.+ 26.04,82.68 25.72,82.36 IN2.1
N$79
  Top 0.165: REG_3.3V.1 24.92,72.04 28.97,67.99 29.84,67.99 REG1.1 29.84,67.91 REG2.2
RST
  Top 0.165: NANO.RST 51.2,33.15 53.66,33.15 PH1.26 53.74,33.15 56.2,33.15 PH1.25
SCK_NRF
  Top 0.165: NANO.D13 51.2,2.67 53.66,2.67 PH1.2 53.74,2.67 56.2,2.67 PH1.1
  Bottom 0.165: NRF24L01.5 25.8,56.64 25.8,55.53 38.73,42.59 38.73,15.05 51.12,2.67 NANO.D13
SDA_GY521
  Top 0.165: PH1.15 56.2,20.45 53.74,20.45 PH1.16 53.66,20.45 51.2,20.45 NANO.A4 51.12,20.45 50.09,21.48 30.96,21.48 29.61,22.83 8.81,22.83 4.21,27.43 4.21,33.31 5.79,34.89 5.79,35.53 GY-521.4
SHIELD_IN
  Top 0.762: 11.03,68.31 16.83,68.31 R_SHIELD.1 | 11.03,68.31 9.29,66.56 USB_B.SHLD1 | 11.03,68.31 10.87,68.63 9.29,70.21 9.29,78.47 USB_B.SHLD2 9.13,78.87 9.13,79.82 7.06,81.88 7.06,84.5 9.76,87.2 9.76,95.14 MICRO_2.MT2 9.92,95.54 12.54,95.54 MICRO_2.P$2 12.94,95.54 15.08,95.54 MICRO_2.P$1 15.48,95.54 17.78,95.54 MICRO_2.MT1 18.18,95.54 20.64,95.54 MICRO_1.MT2 20.95,95.54 23.34,95.54 MICRO_1.P$2 23.73,95.54 25.88,95.54 MICRO_1.P$1 26.27,95.54 28.57,95.54 MICRO_1.MT1 28.89,95.22 29.61,94.5 | MINI_1.S2 41.12,91.49 41.12,96.96 MINI_1.S1 40.72,96.96 32.46,96.96 MINI_1.S3 32.07,96.96 29.84,94.74 29.61,94.5 | 29.61,94.5 32.07,92.04 32.07,91.49 MINI_1.S4
VIN
  Top 0.762: VIN.1 78.66,32.2 78.66,34.5 78.82,34.66 VIN.2 78.66,34.97 78.66,37.2 VIN.3 78.9,37.51 78.9,39.73 VIN.4 78.66,40.05 75.8,42.91 75.8,42.99 75.01,43.78 61.2,43.78 56.44,39.02 56.44,38.54 PH1.29 56.2,38.23 54.05,38.23 PH1.30 53.66,38.23 51.2,38.23 NANO.RAW 51.44,38.54 51.44,41.32 23.5,69.26 23.5,72.91 21.19,75.22 20.56,75.22 17.78,77.99 17.78,79.03 13.18,83.63 13.18,87.68 RAW.PWR

## Text on the board
tPlace: 1k | 2k | ESP_POWER | GPIO0 | RX | D- | GPIO2 | D+ | RST | TX | NC | IRQ | MISO | MOSI | SCK | CSN | CE | VCC | GND | INT | INT | ADO | 5V | 3V3 | GND | connected / to board / _power | ADO | LoRa | 5V | SWITCH | VCC | XCL | DTR_RST | VIN | XCL | 3.3V | TX | VIN | XDA | D1 | 5 | 3 | 1 | XDA | SDA | AUX | RX | 6 | 4 | 2 | GND | D0 | RST | SCL | TXD | RST | GND | RXD | 5V | GND | A7 | VCC | M1 | INT0 | 4.7K | 4.7K | D2 | 3V3 | DTR | RXD | TXD | GND | 5V | ~INT1 | A6 | M0 | D3 | NANO | A5 | RST | D4 | SCL | ~ | A4 | 0 | D5 | SDA | NSS | ~ | A3 | 1 | D6 | SCK | A2 | GND | D+ | D- | 5V | MOSI | D7 | MISO | 2 | MISO | A1 | 3 | D8 | MOSI~ | ~ | A0 | SCK | D9 | SS~ | OFF | PRO / MINI | AREF | 5V | 5 | ~SS | D10 | 3.3V | 4 | ~MOSI | D11 | VCC | D13 | 3.3V | MISO | D12 | SCK | BOARD_POWER | RA02 / POW
silktop: TOP
silkbottom: BOT